# Altium PCB clock_pcb.PcbDoc (part 1 of 2)
Units mm, origin at the board's own origin, x right, y up, seen from the top; angles counter-clockwise.
Board outline 163.83 x 193.04 mm, 2 copper layers (Top Layer, Bottom Layer); 227 components, 201 nets, 760 pads, 289 vias.
Unrouted connection lines stored in the file: 74.
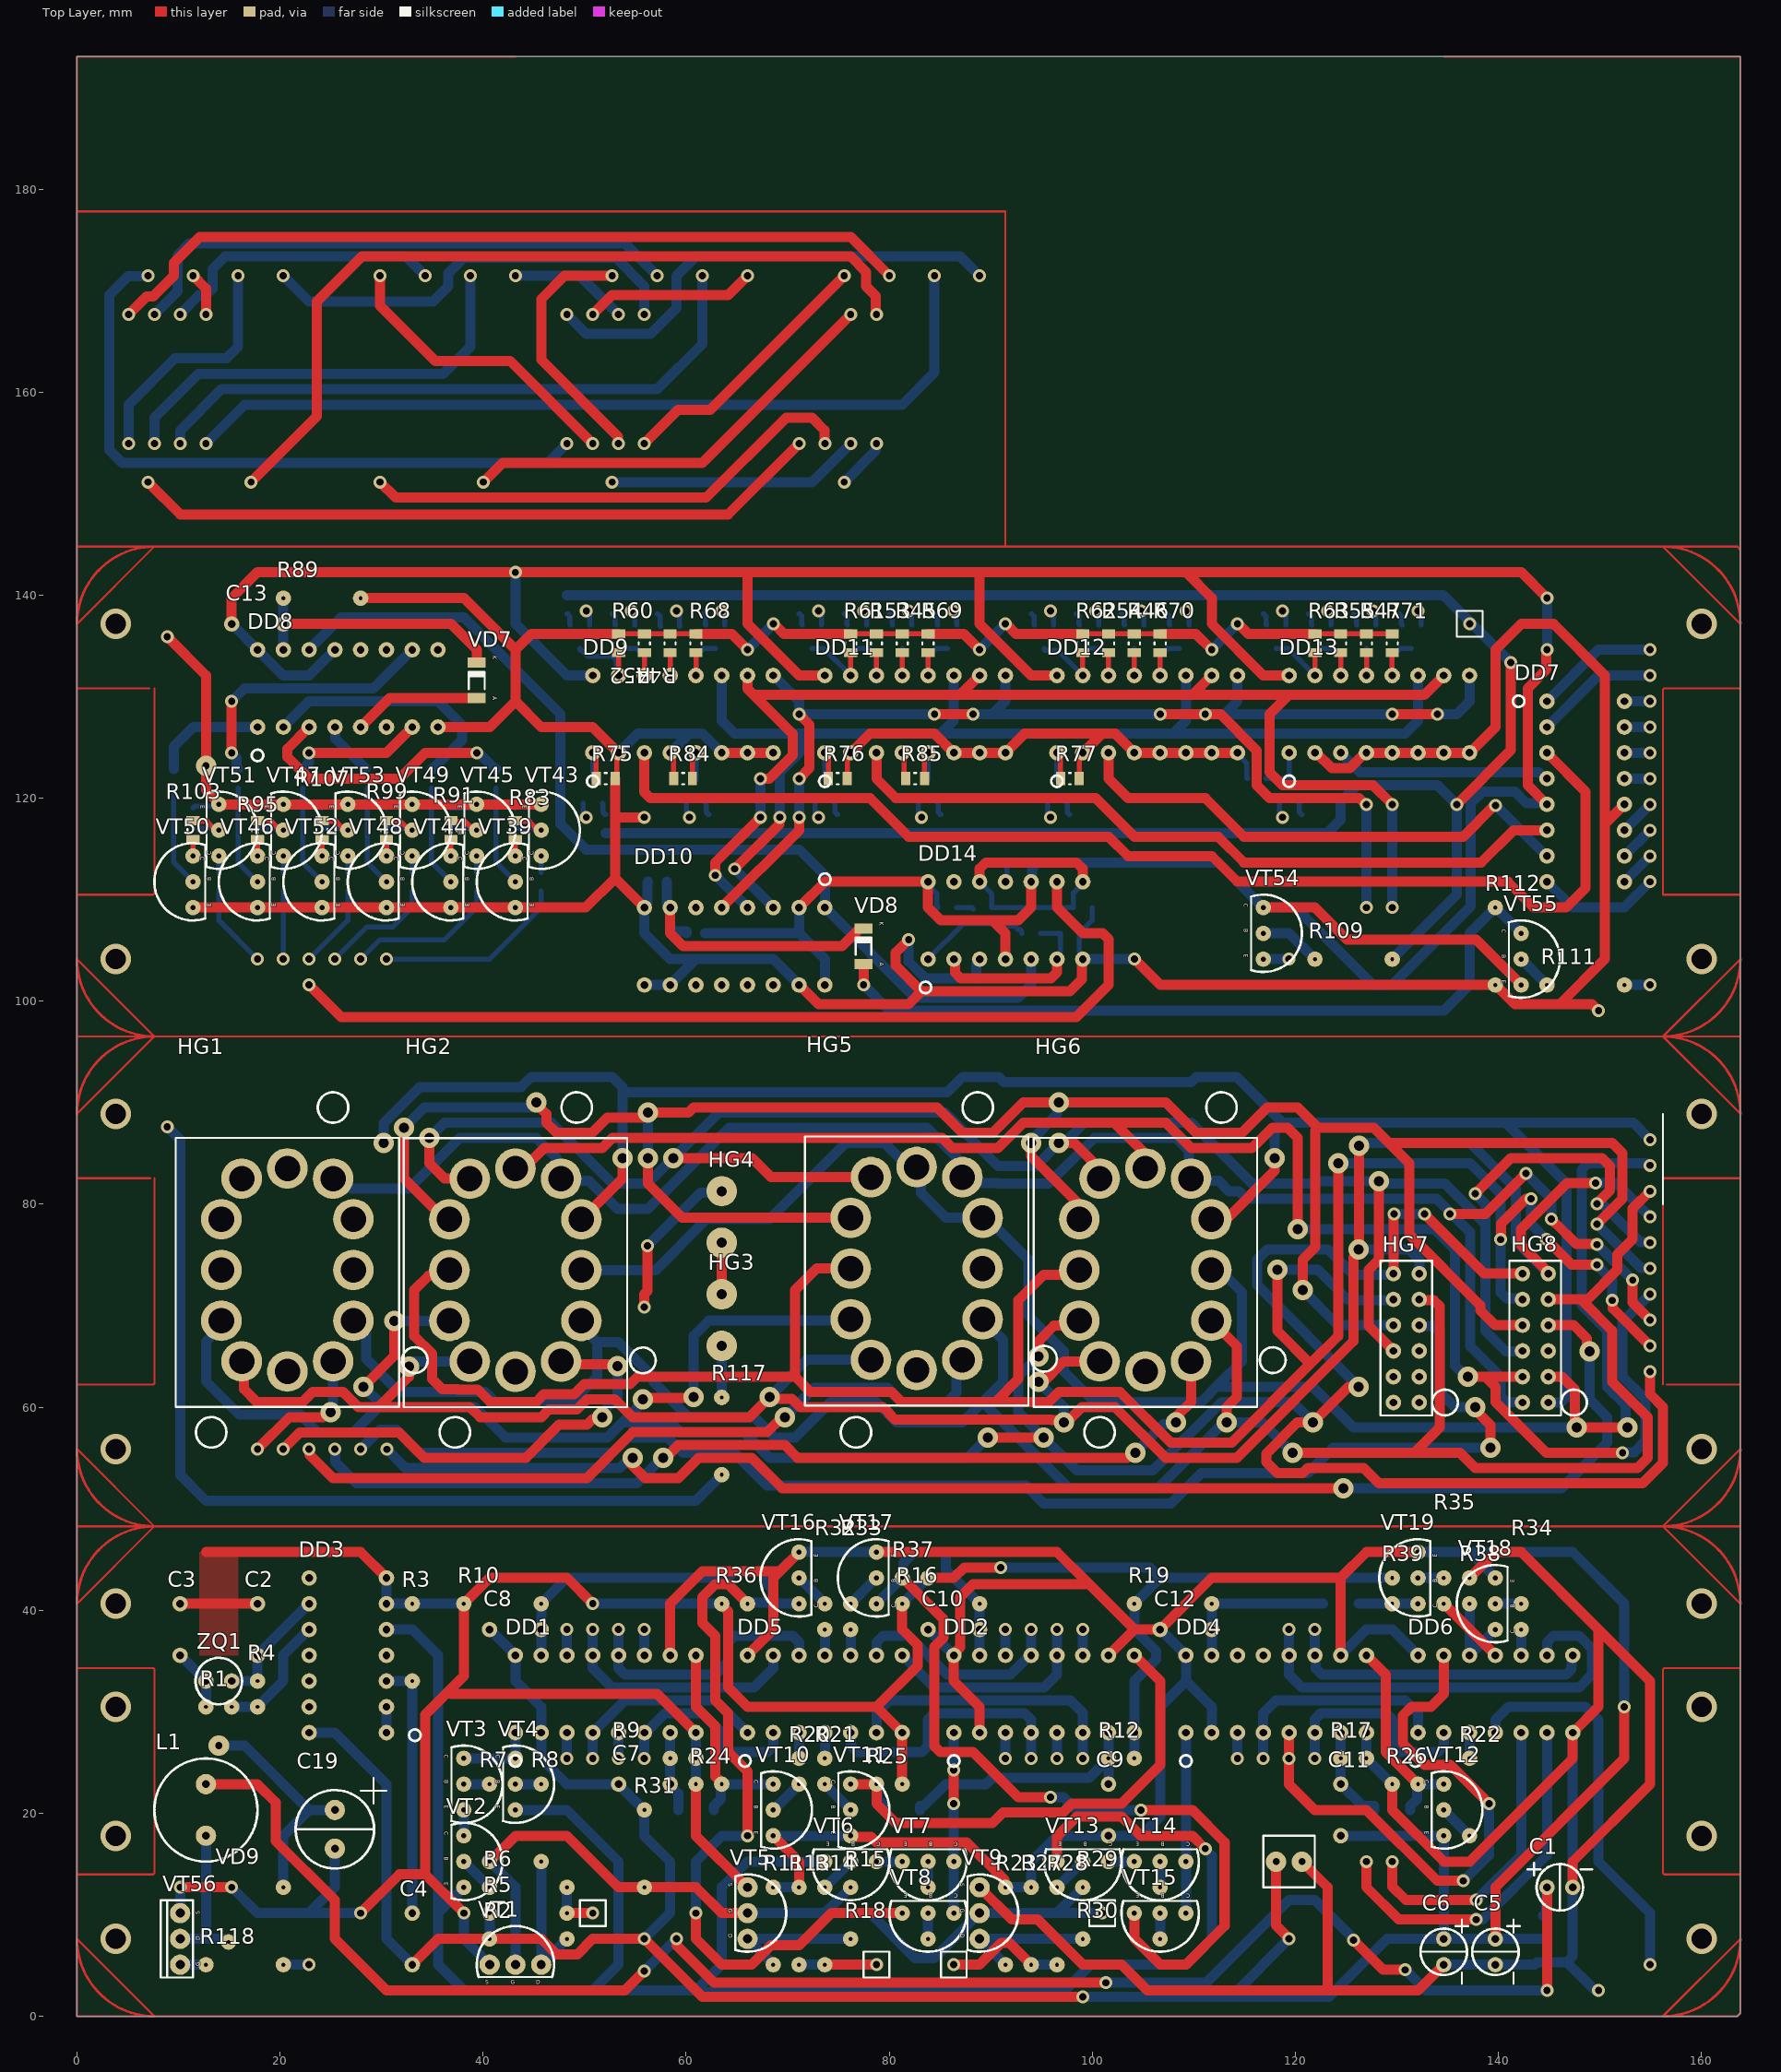
[diagram p0: Top Layer view]
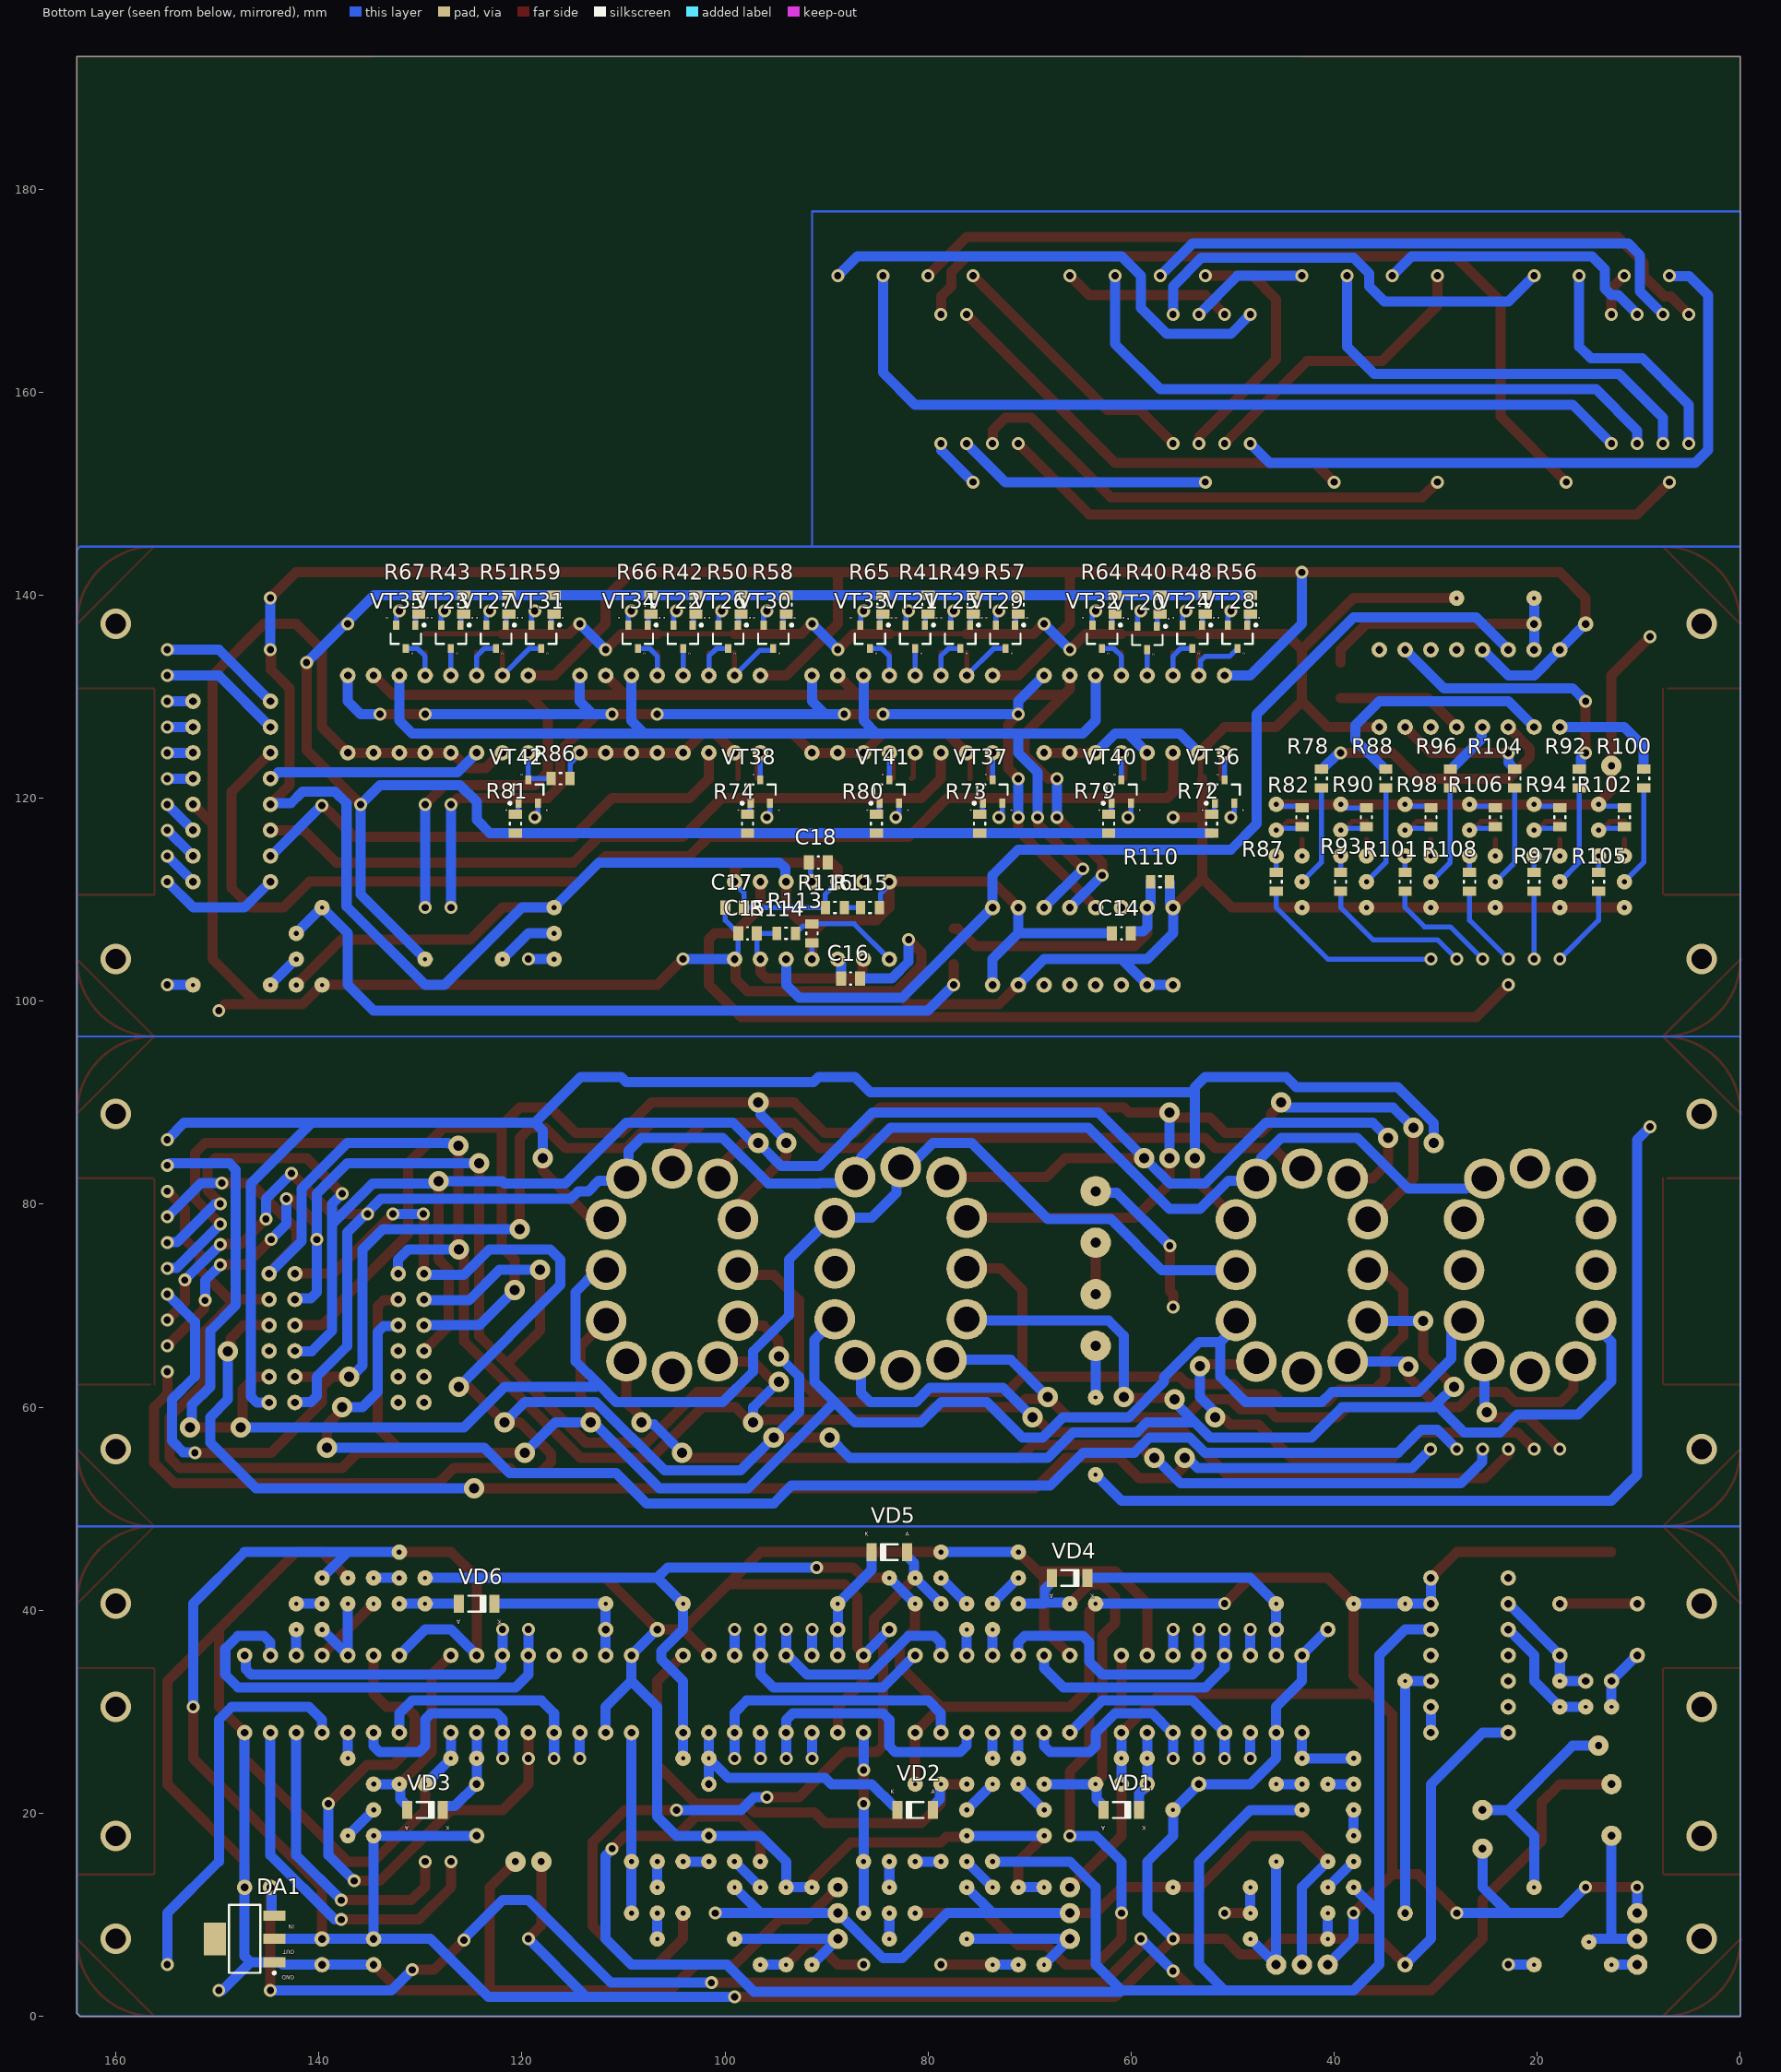
[diagram p1: Bottom Layer view, seen from below]
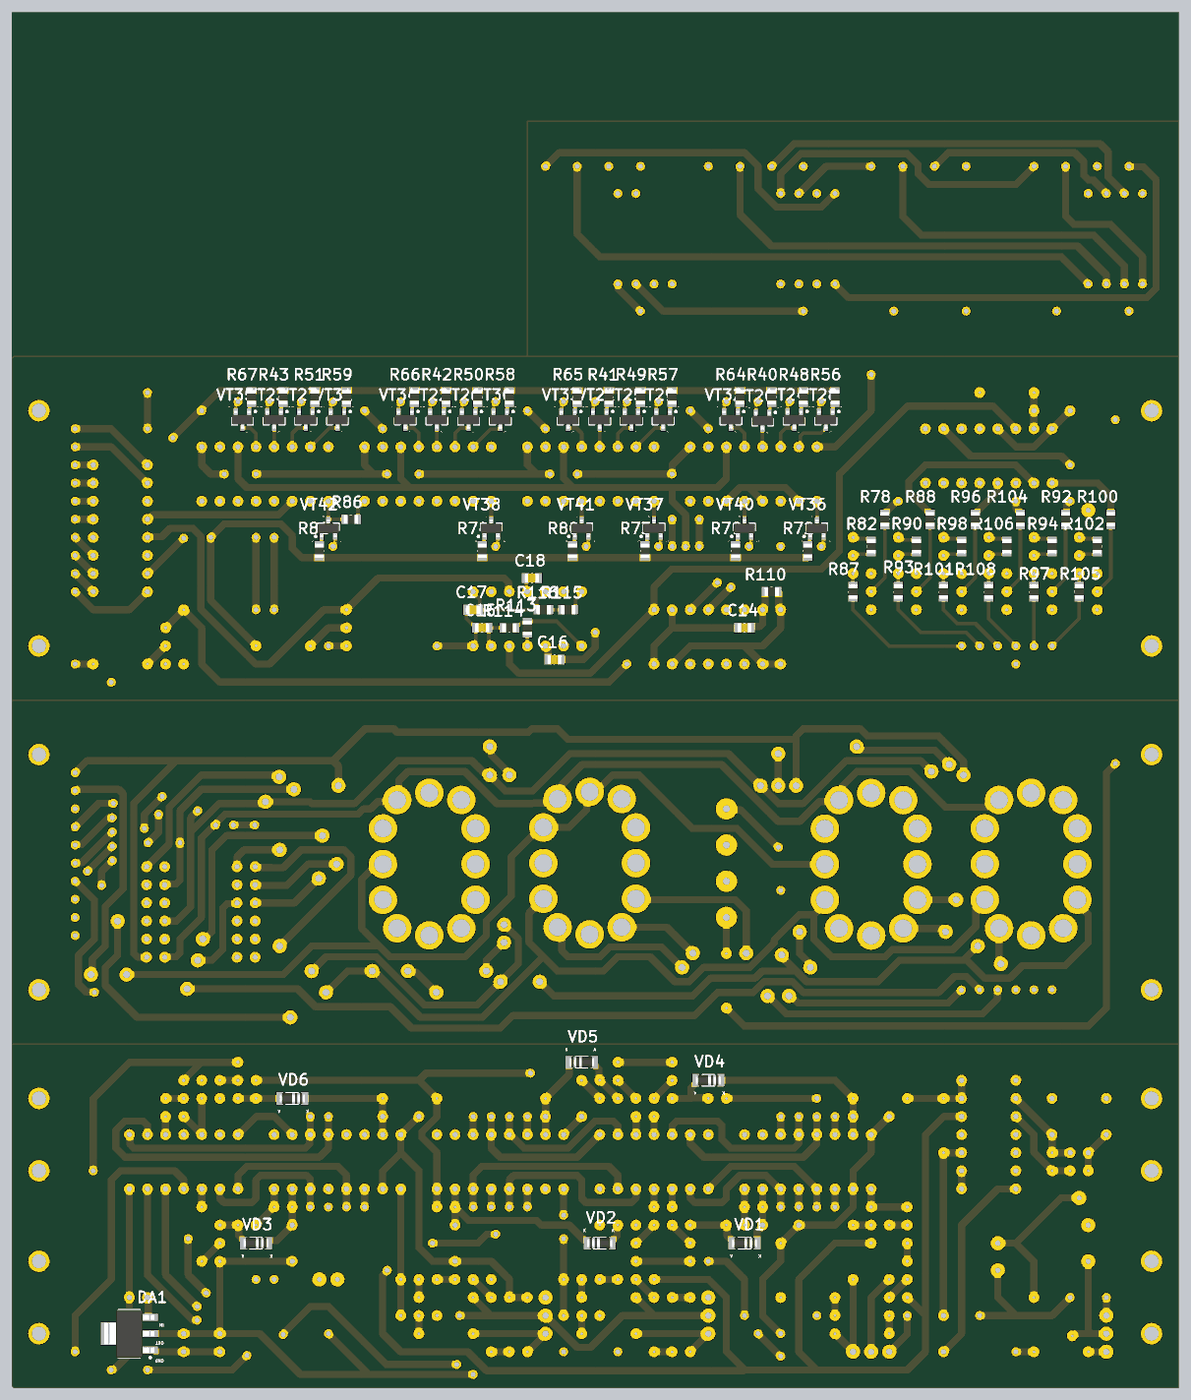
[diagram p3: 3D render of the assembled board from below, using the file's embedded part models]

## Layer stack, top to bottom
Top Solder: solder mask 0.0102, Solder Resist, Dk 3.5
Top Layer: signal copper 0.0356
Dielectric 1: dielectric 0.32, FR-4, Dk 4.8
Bottom Layer: signal copper 0.0356
Bottom Solder: solder mask 0.0102, Solder Resist, Dk 3.5

## Board outline
0,40.64 0,48.26 0,88.9 0,96.52 0,193.04 163.83,193.04 163.83,144.487 163.83,0.293 163.537,0 0,0

## Design rules (kind name [scope] priority, off if disabled: settings)
Clearance [All] p1: gap=0.254 ignorepadtopadclearanceinfootprint=FALSE except(0: Arc-Hole Track-Hole SMDPad-Hole THPad-Hole Via-Hole Fill-Hole Poly-Hole Region-Hole Text-Hole)
ComponentClearance [All] p1: gap=0 collisioncheckmode=3 verticalgap=0 showdistances=TRUE
PolygonConnect [All] p1: connectstyle=Direct reliefconductorwidth=0.254 reliefentries=4 polygonreliefangle="90 Angle" airgapwidth=0.254
RoutingVias [All] p1: holewidth=1 width=2 viastyle="Through Hole" minholewidth=0.5 minwidth=1 maxholewidth=1 maxwidth=2
SolderMaskExpansion [All] p1: expansion=0.102 istentingtop=FALSE
Width [All] p1: maxlimit=1.5 minlimit=0.2 preferedwidth=1 minimp=50.000000 maximp=50.000000 favimp=50.000000
29 further rules are at their usual default settings.

## Classes and differential pairs
component class clock_pow: C15 C16 C17 C18 C19 DD14 HG1 HG2 HG3 HG4 HG5 HG6 HG7 HG8 L1 R113 R114 R115 R116 R117 R118 VD9 VT56
component class clock_mux: C13 C14 DD7 DD8 DD9 DD10 DD11 DD12 DD13 R40 R41 R42 R43 R44 R45 R46 R47 R48 R49 R50 R51 R52 R53 R54 R55 R56 R57 R58 R59 R60 R61 R62 R63 R64 R65 R66 R67 R68 R69 R70 R71 R72 R73 R74 R75 R76 R77 R78 R79 R80 R81 R82 R83 R84 R85 R86 R87 R88 R89 R90 R91 R92 R93 R94 R95 R96 R97 R98 R99 R100 R101 R102 R103 R104 R105 R106 R107 R108 R109 R110 R111 R112 VD7 VD8 VT20 VT21 VT22 VT23 VT24 VT25 VT26 VT27 VT28 VT29 VT30 VT31 VT32 VT33 VT34 VT35 VT36 VT37 VT38 VT39 VT40 VT41 VT42 VT43 VT44 VT45 VT46 VT47 VT48 VT49 VT50 VT51 VT52 VT53 VT54 VT55
component class clock_core: C1 C2 C3 C4 C5 C6 C7 C8 C9 C10 C11 C12 DA1 DD1 DD2 DD3 DD4 DD5 DD6 R1 R2 R3 R4 R5 R6 R7 R8 R9 R10 R11 R12 R13 R14 R15 R16 R17 R18 R19 R20 R21 R22 R23 R24 R25 R26 R27 R28 R29 R30 R31 R32 R33 R34 R35 R36 R37 R38 R39 VD1 VD2 VD3 VD4 VD5 VD6 VT1 VT2 VT3 VT4 VT5 VT6 VT7 VT8 VT9 VT10 VT11 VT12 VT13 VT14 VT15 VT16 VT17 VT18 VT19 ZQ1

## Components (designator, comment, footprint, x,y, rotation, side; value= is the part's Value field where it differs from the comment)
C1 "C+" CAP_POL 144.78,12.7 r0 top value="10 u"
C2 "C" CAP_THT 17.78,35.56 r90 top value="56 p"
C3 "C" CAP_THT 10.16,40.64 r270 top value="10 p"
C4 "C" CAP_THT 33.02,10.16 r270 top value="100 n"
C5 "C+" CAP_POL 139.7,7.62 r270 top value="10 u"
C6 "C+" CAP_POL 134.62,7.62 r270 top value="10 u"
C7 "C" CAP_THT 58.42,22.86 r180 top value="100 n"
C8 "C" CAP_THT 45.72,38.1 r180 top value="100 n"
C9 "C" CAP_THT 101.6,22.86 r270 top value="100 n"
C10 "C" CAP_THT 88.9,38.1 r180 top value="100 n"
C11 "C" CAP_THT 124.46,22.86 r270 top value="100 n"
C12 "C" CAP_THT 111.76,38.1 r180 top value="100 n"
C13 "C" CAP_THT 20.32,137.16 r180 top value="100 n"
C14 "C" CAP_SMD 60.96,106.68 r0 bottom value="100 n"
C15 "C" CAP_SMD 97.79,106.68 r0 bottom value="100 n"
C16 "C" CAP_SMD 87.63,102.235 r0 bottom value="100 n"
C17 "C" CAP_SMD 99.06,109.22 r0 bottom value="10 n"
C18 "C" CAP_SMD 90.805,113.665 r0 bottom value="100 n"
C19 "C+" CAP_HIGH_VOLT 25.4,20.32 r270 top value="4.7 u"
DA1 "AMS1117_5V" SOT230 147.32,7.62 r0 bottom
DD1 "К561ИЕ10" DIP-16 43.18,27.94 r90 top
DD2 "К561ИЕ10" DIP-16 86.36,27.94 r90 top
DD3 "К176ИЕ5" DIP-14 30.48,27.94 r180 top
DD4 "К561ИЕ10" DIP-16 109.22,27.94 r90 top
DD5 "К561ЛА7" DIP-14 66.04,27.94 r90 top
DD6 "К561ЛА7" DIP-14 132.08,27.94 r90 top
DD7 "К155ИД1" DIP-16 144.78,129.54 r0 top
DD8 "К561ИЕ8" DIP-16 17.78,127 r90 top
DD9 "К561КП2" DIP-16 50.8,124.46 r90 top
DD10 "К561ИЕ10" DIP-16 73.66,109.22 r270 top
DD11 "К561КП2" DIP-16 73.66,124.46 r90 top
DD12 "К561КП2" DIP-16 96.52,124.46 r90 top
DD13 "К561КП2" DIP-16 119.38,124.46 r90 top
DD14 "NE556" DIP-14 83.82,104.14 r90 top
HG1 "ИН-12" IN-12 14.22,73.52 r0 top
HG2 "ИН-12" IN-12 36.68,73.5 r0 top
HG3 "ИНА_ТН_02" INA_TN_02 63.5,66.04 r90 top
HG4 "ИНА_ТН_02" INA_TN_02 63.5,76.2 r90 top
HG5 "ИН-12" IN-12 76.2,73.66 r0 top
HG6 "ИН-12" IN-12 98.72,73.52 r0 top
HG7 "ИН-17" IN-17 129.66,60.46 r0 top
HG8 "ИН-17" IN-17 142.36,60.46 r0 top
L1 "L" IND 12.7,22.86 r270 top value="220 u"
R1 "R" RES-DIP-V 12.7,30.48 r0 top value="520 k"
R2 "R" RES-DIP 48.26,7.62 r180 top value="1 M"
R3 "R" RES-DIP 33.02,40.64 r270 top value="100 k"
R4 "R" RES-DIP-V 17.78,30.48 r90 top value="10 M"
R5 "R" RES-DIP 48.26,10.16 r180 top value="100 k"
R6 "R" RES-DIP 48.26,12.7 r180 top value="1 M"
R7 "R" RES-DIP 40.64,15.24 r90 top value="1 M"
R8 "R" RES-DIP 45.72,22.86 r270 top value="1 M"
R9 "R" RES-DIP-V 60.96,25.4 r180 top value="10 k"
R10 "R" RES-DIP 38.1,40.64 r0 top value="10 k"
R11 "R" RES-DIP 68.58,5.08 r90 top value="1 M"
R12 "R" RES-DIP-V 104.14,25.4 r180 top value="10 k"
R13 "R" RES-DIP 71.12,5.08 r90 top value="100 k"
R14 "R" RES-DIP 73.66,5.08 r90 top value="1 M"
R15 "R" RES-DIP 76.2,12.7 r0 top value="1 M"
R16 "R" RES-DIP 81.28,40.64 r0 top value="10 k"
R17 "R" RES-DIP-V 127,25.4 r180 top value="10 k"
R18 "R" RES-DIP 83.82,7.62 r180 top value="1 M"
R19 "R" RES-DIP 104.14,40.64 r0 top value="10 k"
R20 "R" RES-DIP-V 71.12,25.4 r270 top value="1 k"
R21 "R" RES-DIP-V 73.66,25.4 r270 top value="1 k"
R22 "R" RES-DIP 137.16,25.4 r270 top value="1 k"
R23 "R" RES-DIP 91.44,5.08 r90 top value="1 M"
R24 "R" RES-DIP-V 60.96,22.86 r0 top value="100 k"
R25 "R" RES-DIP-V 81.28,22.86 r180 top value="100 k"
R26 "R" RES-DIP-V 129.54,22.86 r0 top value="100 k"
R27 "R" RES-DIP 93.98,5.08 r90 top value="100 k"
R28 "R" RES-DIP 96.52,5.08 r90 top value="1 M"
R29 "R" RES-DIP 99.06,12.7 r0 top value="1 M"
R30 "R" RES-DIP 106.68,7.62 r180 top value="1 M"
R31 "R" RES-DIP 55.88,20.32 r270 top value="10 k"
R32 "R" RES-DIP-V 73.66,38.1 r90 top value="1 k"
R33 "R" RES-DIP-V 76.2,38.1 r90 top value="1 k"
R34 "R" RES-DIP-V 142.24,38.1 r90 top value="1 k"
R35 "R" RES-DIP-V 134.62,40.64 r90 top value="1 k"
R36 "R" RES-DIP-V 63.5,40.64 r0 top value="100 k"
R37 "R" RES-DIP-V 83.82,43.18 r180 top value="100 k"
R38 "R" RES-DIP-V 137.16,43.18 r270 top value="100 k"
R39 "R" RES-DIP-V 129.54,43.18 r270 top value="100 k"
R40 "R" RES_SMD 57.15,139.065 r270 bottom value="5.1 k"
R41 "R" RES_SMD 80.01,139.065 r270 bottom value="5.1 k"
R42 "R" RES_SMD 102.87,139.065 r270 bottom value="5.1 k"
R43 "R" RES_SMD 125.73,139.065 r270 bottom value="5.1 k"
R44 "R" RES_SMD 58.42,135.255 r270 top value="100 k"
R45 "R" RES_SMD 81.28,135.255 r270 top value="100 k"
R46 "R" RES_SMD 104.14,135.255 r270 top value="100 k"
R47 "R" RES_SMD 127,135.255 r270 top value="100 k"
R48 "R" RES_SMD 52.705,139.065 r270 bottom value="5.1 k"
R49 "R" RES_SMD 75.565,139.065 r270 bottom value="5.1 k"
R50 "R" RES_SMD 98.425,139.065 r270 bottom value="5.1 k"
R51 "R" RES_SMD 121.285,139.065 r270 bottom value="5.1 k"
R52 "R" RES_SMD 55.88,135.255 r270 top value="100 k"
R53 "R" RES_SMD 78.74,135.255 r270 top value="100 k"
R54 "R" RES_SMD 101.6,135.255 r270 top value="100 k"
R55 "R" RES_SMD 124.46,135.255 r270 top value="100 k"
R56 "R" RES_SMD 48.26,139.065 r270 bottom value="5.1 k"
R57 "R" RES_SMD 71.12,139.065 r270 bottom value="5.1 k"
R58 "R" RES_SMD 93.98,139.065 r270 bottom value="5.1 k"
R59 "R" RES_SMD 116.84,139.065 r270 bottom value="5.1 k"
R60 "R" RES_SMD 53.34,135.255 r270 top value="100 k"
R61 "R" RES_SMD 76.2,135.255 r270 top value="100 k"
R62 "R" RES_SMD 99.06,135.255 r270 top value="100 k"
R63 "R" RES_SMD 121.92,135.255 r270 top value="100 k"
R64 "R" RES_SMD 61.595,139.065 r270 bottom value="5.1 k"
R65 "R" RES_SMD 84.455,139.065 r270 bottom value="5.1 k"
R66 "R" RES_SMD 107.315,139.065 r270 bottom value="5.1 k"
R67 "R" RES_SMD 130.175,139.065 r270 bottom value="5.1 k"
R68 "R" RES_SMD 60.96,135.255 r270 top value="100 k"
R69 "R" RES_SMD 83.82,135.255 r270 top value="100 k"
R70 "R" RES_SMD 106.68,135.255 r270 top value="100 k"
R71 "R" RES_SMD 129.54,135.255 r270 top value="100 k"
R72 "R" RES_SMD 52.07,117.475 r90 bottom value="5.1 k"
R73 "R" RES_SMD 74.93,117.475 r90 bottom value="5.1 k"
R74 "R" RES_SMD 97.79,117.475 r90 bottom value="5.1 k"
R75 "R" RES_SMD 52.07,121.92 r180 top value="100 k"
R76 "R" RES_SMD 74.93,121.92 r180 top value="100 k"
R77 "R" RES_SMD 97.79,121.92 r180 top value="100 k"
R78 "R" RES_SMD 41.275,121.92 r270 bottom value="10 k"
R79 "R" RES_SMD 62.23,117.475 r90 bottom value="5.1 k"
R80 "R" RES_SMD 85.09,117.475 r90 bottom value="5.1 k"
R81 "R" RES_SMD 120.65,117.475 r90 bottom value="5.1 k"
R82 "R" RES_SMD 43.18,118.11 r90 bottom value="10 k"
R83 "R" RES_SMD 43.18,116.84 r90 top value="1 M"
R84 "R" RES_SMD 59.69,121.92 r0 top value="100 k"
R85 "R" RES_SMD 82.55,121.92 r0 top value="100 k"
R86 "R" RES_SMD 116.205,121.92 r0 bottom value="100 k"
R87 "R" RES_SMD 45.72,111.76 r90 bottom value="20 k"
R88 "R" RES_SMD 34.925,121.92 r270 bottom value="10 k"
R89 "R" RES-DIP 27.94,139.7 r180 top value="10 k"
R90 "R" RES_SMD 36.83,118.11 r90 bottom value="10 k"
R91 "R" RES_SMD 36.83,116.84 r90 top value="1 M"
R92 "R" RES_SMD 15.875,121.92 r270 bottom value="10 k"
R93 "R" RES_SMD 39.37,111.76 r90 bottom value="20 k"
R94 "R" RES_SMD 17.78,118.11 r90 bottom value="10 k"
R95 "R" RES_SMD 17.78,116.84 r90 top value="1 M"
R96 "R" RES_SMD 28.575,121.92 r270 bottom value="10 k"
R97 "R" RES_SMD 20.32,111.76 r90 bottom value="20 k"
R98 "R" RES_SMD 30.48,118.11 r90 bottom value="10 k"
R99 "R" RES_SMD 30.48,116.84 r90 top value="1 M"
R100 "R" RES_SMD 9.525,121.92 r270 bottom value="10 k"
R101 "R" RES_SMD 33.02,111.76 r90 bottom value="20 k"
R102 "R" RES_SMD 11.43,118.11 r90 bottom value="10 k"
R103 "R" RES_SMD 11.43,116.84 r90 top value="1 M"
R104 "R" RES_SMD 22.225,121.92 r270 bottom value="10 k"
R105 "R" RES_SMD 13.97,111.76 r90 bottom value="20 k"
R106 "R" RES_SMD 24.13,118.11 r90 bottom value="10 k"
R107 "R" RES_SMD 24.13,116.84 r90 top value="1 M"
R108 "R" RES_SMD 26.67,111.76 r90 bottom value="20 k"
R109 "R" RES-DIP 129.54,104.14 r180 top value="10 k"
R110 "R" RES_SMD 57.15,111.76 r0 bottom value="10 k"
R111 "R" RES-DIP 152.4,101.6 r180 top value="1 k"
R112 "R" RES-DIP 139.7,101.6 r90 top value="100 k"
R113 "R" RES_SMD 91.44,106.68 r270 bottom value="20 k"
R114 "R" RES_SMD 93.98,106.68 r180 bottom value="10 k"
R115 "R" RES_SMD 85.725,109.22 r180 bottom value="2.2 k"
R116 "R" RES_SMD 89.19,109.22 r180 bottom value="1.2 k"
R117 "R" RES-DIP 63.5,53.34 r90 top value="100 k"
R118 "R" RES-DIP 20.32,5.08 r180 top value="10 k"
VD1 "1N4148" DIOD 60.96,20.32 r0 bottom
VD2 "1N4148" DIOD 81.28,20.32 r180 bottom
VD3 "1N4148" DIOD 129.54,20.32 r0 bottom
VD4 "1N4148" DIOD 66.04,43.18 r0 bottom
VD5 "1N4148" DIOD 83.82,45.72 r180 bottom
VD6 "1N4148" DIOD 124.46,40.64 r0 bottom
VD7 "1N4148" DIOD 39.37,131.6 r270 top
VD8 "1N4148" DIOD 77.47,105.41 r270 top
VD9 "1N4007" RES-DIP 20.32,12.7 r225 top
VT1 "2N7000" 2N7000 40.64,5.08 r0 top
VT2 "BC327" BC327 38.1,17.78 r270 top
VT3 "BC327" BC327 38.1,25.4 r270 top
VT4 "BC327" BC327 43.18,25.4 r270 top
VT5 "2N7000" 2N7000 66.04,12.7 r270 top
VT6 "BC327" BC327 78.74,15.24 r180 top
VT7 "BC327" BC327 86.36,15.24 r180 top
VT8 "BC327" BC327 86.36,10.16 r180 top
VT9 "2N7000" 2N7000 88.9,12.7 r270 top
VT10 "BC327" BC327 68.58,22.86 r270 top
VT11 "BC327" BC327 76.2,22.86 r270 top
VT12 "BC327" BC327 134.62,22.86 r270 top
VT13 "BC327" BC327 101.6,15.24 r180 top
VT14 "BC327" BC327 109.22,15.24 r180 top
VT15 "BC327" BC327 109.22,10.16 r180 top
VT16 "BC327" BC327 71.12,40.64 r90 top
VT17 "BC327" BC327 78.74,40.64 r90 top
VT18 "BC327" BC327 139.7,38.1 r90 top
VT19 "BC327" BC327 132.08,40.64 r90 top
VT20 "BC807" SOT95 58.42,135.77 r270 bottom
VT21 "BC807" SOT95 81.28,135.89 r270 bottom
VT22 "BC807" SOT95 104.14,135.89 r270 bottom
VT23 "BC807" SOT95 127,135.89 r270 bottom
VT24 "BC807" SOT95 53.975,135.89 r270 bottom
VT25 "BC807" SOT95 76.835,135.89 r270 bottom
VT26 "BC807" SOT95 99.695,135.89 r270 bottom
VT27 "BC807" SOT95 122.555,135.89 r270 bottom
VT28 "BC807" SOT95 49.53,135.89 r270 bottom
VT29 "BC807" SOT95 72.39,135.89 r270 bottom
VT30 "BC807" SOT95 95.25,135.89 r270 bottom
VT31 "BC807" SOT95 118.11,135.89 r270 bottom
VT32 "BC807" SOT95 62.865,135.89 r270 bottom
VT33 "BC807" SOT95 85.725,135.89 r270 bottom
VT34 "BC807" SOT95 108.585,135.89 r270 bottom
VT35 "BC807" SOT95 131.445,135.89 r270 bottom
VT36 "BC807" SOT95 50.8,120.65 r90 bottom
VT37 "BC807" SOT95 73.66,120.65 r90 bottom
VT38 "BC807" SOT95 96.52,120.65 r90 bottom
VT39 "2N5551" 2N5551 43.18,109.22 r90 top
VT40 "BC807" SOT95 60.96,120.65 r90 bottom
VT41 "BC807" SOT95 83.82,120.65 r90 bottom
VT42 "BC807" SOT95 119.38,120.65 r90 bottom
VT43 "2N5401" 2N5401 45.72,119.38 r270 top
VT44 "2N5551" 2N5551 36.83,109.22 r90 top
VT45 "2N5401" 2N5401 39.37,119.38 r270 top
VT46 "2N5551" 2N5551 17.78,109.22 r90 top
VT47 "2N5401" 2N5401 20.32,119.38 r270 top
VT48 "2N5551" 2N5551 30.48,109.22 r90 top
VT49 "2N5401" 2N5401 33.02,119.38 r270 top
VT50 "2N5551" 2N5551 11.43,109.22 r90 top
VT51 "2N5401" 2N5401 13.97,119.38 r270 top
VT52 "2N5551" 2N5551 24.13,109.22 r90 top
VT53 "2N5401" 2N5401 26.67,119.38 r270 top
VT54 "BC327" BC327 116.84,109.22 r270 top
VT55 "BC327" BC327 142.24,106.68 r270 top
VT56 "IRF840" IRF840 10.16,5.08 r90 top
ZQ1 "HZ" HZ 12.7,33.02 r0 top

## Footprints (in the part's own frame and the unit in brackets; to place one, negate y for a bottom-side part, rotate by r counter-clockwise, add the part's x,y. Pads: shape width x height; smd on the part's side, far side on the other; paste and mask are expansions set on the pad)
2N5401 [mil]
  round 60 hole 19.68: 1(0,0) 2(100,0) 3(200,0)
  silkscreen extent -50,-47 250,150, body extent 25,-75 175,75, height 400
2N5551 [mil]
  round 60 hole 19.68: 1(0,0) 2(100,0) 3(200,0)
  silkscreen extent -50,-47 250,150, body extent 25,-75 175,75, height 400
2N7000 [mm]
  round 2 hole 0.9: 1(0,0) 2(2.54,0) 3(5.08,0)
  silkscreen extent -1.27,-1.2 6.35,3.81, body extent 0.64,-1.91 4.44,1.91, height 10.16
BC327 [mil]
  round 60 hole 19.68: 1(0,0) 2(100,0) 3(200,0)
  silkscreen extent -50,-47 250,150, body extent 25,-75 175,75, height 400
CAP_HIGH_VOLT [mm]
  round 2 hole 0.762: 1(0,0) 2(3.81,0)
  silkscreen extent -3.18,-3.86 5.77,5.08
CAP_POL [mil]
  round 60 hole 30: 1(0,0) 2(100,0)
  silkscreen extent -75,-90 175,95
CAP_SMD [mm] "Chip Capacitor, 2-Leads, Body 2,00x1,25mm, IPC Medium Density"
  rect 1x1.4 smd: 1(-0.925,0) 2(0.925,0)
  silkscreen extent -0.05,-0.6 0.05,0.6, body extent -1,-0.63 1,0.62, height 0.7
CAP_THT [mil]
  round 60 hole 30: 1(0,0) 2(200,0)
  body extent 25,-59 175,59, height 197
DIOD [mm] "MELF Diode, 2-Leads, Body 3,50x1,53mm, IPC Medium Density"
  rect 1x1.75 smd: 1(-1.75,0) 2(1.75,0)
  silkscreen extent -0.85,-0.77 0.85,0.77, body extent -1.75,-0.76 1.75,0.76, height 1.53
DIP-14 [mil]
  round 60 hole 30: 1(0,0) 2(0,-100) 3(0,-200) 4(0,-300) 5(0,-400) 6(0,-500) 7(0,-600) 8(300,-600) 9(300,-500) 10(300,-400) 11(300,-300) 12(300,-200) 13(300,-100) 14(300,0)
  silkscreen extent -132,-12 -88,32, body extent -50,-650 350,50, height 315
DIP-16 [mil]
  round 60 hole 30: 1(0,0) 2(0,-100) 3(0,-200) 4(0,-300) 5(0,-400) 6(0,-500) 7(0,-600) 8(0,-700) 9(300,-700) 10(300,-600) 11(300,-500) 12(300,-400) 13(300,-300) 14(300,-200) 15(300,-100) 16(300,0)
  silkscreen extent -132,-22 -88,22, body extent -50,-750 350,50, height 315
HZ [mil]
  round 60 hole 30: 1(0,0) 2(100,0)
  silkscreen extent -40,-90 140,90
IN-12 [mm]
  round 4 hole 2.5: 1(11,-9) 2(13,-5) 3(13,0) 4(13,5) 5(11,9) 6(6.5,10) 7(2,9) 8(0,5) 9(0,0) 10(0,-5) 11(2,-9) 12(6.5,-10)
  silkscreen extent -4.5,-13.5 20.32,13, body extent -4.5,-21.5 17.5,20.5, height 11
IN-17 [mil]
  round 60 hole 30: 1(100,300) 2(100,400) 3(100,500) 4(0,500) 5(0,400) 6(0,300) 7(0,200) 8(0,100) 9(0,0) 10(100,0) 11(100,100) 12(100,200)
  silkscreen extent -50,-50 250,550
INA_TN_02 [mm]
  round 3 hole 1: 1(0,0) 2(5.08,0)
IND [mm]
  round 2 hole 0.762: 1(0,0) 2(5.08,0)
  silkscreen extent -2.54,-5.08 7.62,5.08
IRF840 [mm]
  round 2 hole 0.9: 1(0,0) 2(2.54,0) 3(5.08,0)
  silkscreen extent -1.27,-1.27 6.35,1.91, body extent 0.63,-1.91 4.44,1.91, height 10.16
RES-DIP [mil]
  round 60 hole 15.75: 1(0,0) 2(300,0)
  body extent 50,-50 250,50, height 100
RES-DIP-V [mil]
  round 60 hole 15.75: 1(0,0) 2(100,0)
  body extent 50,-50 150,50, height 200
RES_SMD [mm] "Chip Resistor, 2-Leads, Body 2,00x1,25mm, IPC Medium Density"
  rect 0.9x1.3 smd: 1(-0.925,0) 2(0.925,0)
  silkscreen extent -0.1,-0.55 0.1,0.55, body extent -1,-0.63 1,0.62, height 0.7
SOT95 [mm] "SOT23, 3-Leads, Body 2,90x2,30mm, Pitch 0,95mm, IPC Medium Density"
  rect 0.9x0.6 smd: 1(-1.15,0.95) 2(-1.15,-0.95) 3(1.15,0)
  silkscreen extent -1.27,-1.5 0.7,1.92, body extent -1.25,-1.5 1.25,1.5, height 1.1
SOT230 [mm] "SOT223, 4-Leads, Body 6,50x7,00mm (avg), Pitch 2,30mm, IPC Medium Density"
  rect 2.15x1 smd: 1(-2.925,2.3) 2(-2.925,0) 3(-2.925,-2.3)
  rect 2.15x3.2 smd: 4(2.925,0)
  silkscreen extent -3.05,-3.35 1.55,3.47, body extent -3.5,-3.35 3.5,3.35, height 1.8

## Via types
v1: diameter 1.27, hole 0.711, Top Layer to Bottom Layer, 220 vias
v2: diameter 2, hole 1, Top Layer to Bottom Layer, 49 vias
v3: diameter 3, hole 2, Top Layer to Bottom Layer, 16 vias
v4: diameter 2, hole 0.7, Top Layer to Bottom Layer, 2 vias
v5: diameter 2, hole 0.711, Top Layer to Bottom Layer, 2 vias

## Nets (pads, with @x,y where several pads share a name; then routed paths per layer and width w, separated by ;. In a path a pad name is that pad's centre, name@x,y a point inside that pad or via, vN(x,y) a via of type N, cw(c..) or ccw(c..) an arc to the next point about the centre after c; other vN are vias at no path point)
5V: C4.2 C5.1 C6.1 C7.2 C8.2 C9.2 C10.2 C11.2 C12.2 DA1.2 DD1.2 DD1.10 DD1.16 DD2.2 DD2.10 DD2.16 DD3.14 DD4.2 DD4.10 DD4.16 DD5.14 DD6.14 R2.2 R5.2 R11.2 R13.2 R23.2 R27.2 R31.1 VT10.3 VT11.3 VT12.3 VT16.3 VT17.3 VT18.3 VT19.3 VT54.3 | length 524
  Top Layer w1: C4.2@33.02,5.08 35.56,7.62 R2.2@40.64,7.62 45.72,7.62 47.236,6.104 49.284,6.104 50.8,7.62 v1(55.88,7.62) 61.595,1.905 89.408,1.905 v1(99.06,1.905) ; DD1.10@58.42,35.56 58.42,40.64 61.595,43.815 69.215,43.815 ; DD5.14@66.04,35.56 68.58,38.1 68.58,43.18 69.215,43.815 ; VT10.3@68.58,17.78 71.12,15.24 R13.2@71.12,12.7 ; VT16.3@71.12,45.72 69.215,43.815 ; VT11.3@76.2,17.78 76.3,17.68 78.205,17.68 78.74,17.145 87.63,17.145 91.34,13.435 91.34,12.8 R23.2@91.44,12.7 ; VT17.3@78.74,45.72 96.52,45.72 99.695,42.545 ; DD2.2@88.9,27.94 88.9,30.48 86.36,33.02 DD2.16@86.36,35.56 86.36,35.702 86.995,36.337 86.995,41.275 88.265,42.545 99.695,42.545 ; DD2.10@101.6,35.56 104.14,38.1 ; v4(118.11,15.24) 118.11,8.963 119.38,7.693 v1(119.38,7.62) ; DD4.10@124.46,35.56 124.46,43.18 ; VT19.3@132.08,45.72 127,45.72 124.46,43.18 ; C5.1@139.7,7.62 139.7,12.7 152.4,25.4 v1(152.4,30.48) ; 99.695,42.545 104.14,38.1 ; 104.14,38.1 C12.2@106.68,38.1 111.76,43.18 124.46,43.18
  Bottom Layer w1: DD3.14@22.86,27.94 25.4,27.94 30.48,22.86 30.48,7.62 C4.2@33.02,5.08 ; R2.2@40.64,7.62 R5.2@40.64,10.16 ; C8.2@40.64,38.1 DD1.16@43.18,35.56 43.18,33.02 45.72,30.48 45.72,25.4 48.26,22.86 C7.2@53.34,22.86 R31.1@55.88,20.32 55.88,17.78 58.42,15.24 58.42,10.16 v1(55.88,7.62) ; R11.2@68.58,12.7 R13.2@71.12,12.7 ; VT10.3@68.58,17.78 VT11.3@76.2,17.78 ; VT16.3@71.12,45.72 VT17.3@78.74,45.72 ; C10.2@83.82,38.1 DD2.16@86.36,35.56 ; R23.2@91.44,12.7 R27.2@93.98,12.7 93.98,15.24 96.52,17.78 C9.2@101.6,17.78 104.775,17.78 106.68,19.685 106.68,30.48 109.22,33.02 ; v1(99.06,1.905) 123.317,1.905 129.032,7.62 C6.1@134.62,7.62 ; C12.2@106.68,38.1 DD4.16@109.22,35.56 109.22,33.02 ; DD4.2@111.76,27.94 111.76,30.48 109.22,33.02 ; 113.824,2.064 v1(119.38,7.62) ; VT54.3@116.84,104.14 v1(119.38,104.14) ; C11.2@124.46,17.78 VT12.3@134.62,17.78 C6.1@134.62,7.62 ; DD4.10@124.46,35.56 127,38.1 129.54,38.1 DD6.14@132.08,35.56 ; VT19.3@132.08,45.72 137.16,45.72 ; VT18.3@139.7,43.18 137.16,45.72 ; DA1.2@144.395,7.62 C5.1@139.7,7.62 C6.1@134.62,7.62 ; v1(152.4,30.48) 152.4,40.64 147.32,45.72 137.16,45.72
5V_C: C13.2 C14.2 DD7.5 DD8.13 DD8.16 DD9.16 DD10.2 DD10.16 DD11.16 DD12.16 DD13.16 DD14.4 DD14.10 DD14.14 R113.2 R115.2 VT54.1 VT55.3 | length 386.7
  Top Layer w1: C13.2@15.24,137.16 15.24,139.7 17.78,142.24 v1(43.18,142.24) 66.04,142.24 ; DD10.2@71.12,109.22 73.66,111.76 DD14.14@83.82,111.76 83.82,109.22 85.09,107.95 90.17,107.95 ; DD11.16@73.66,132.08 71.12,132.08 66.04,137.16 66.04,142.24 ; DD14.4@91.44,104.14 91.44,106.68 90.17,107.95 ; DD14.10@93.98,111.76 93.98,109.22 92.71,107.95 90.17,107.95 ; DD12.16@96.52,132.08 93.98,132.08 88.9,137.16 88.9,142.24 ; VT54.1@116.84,109.22 121.92,109.22 125.095,106.045 137.795,106.045 VT55.3@142.24,101.6 ; DD13.16@119.38,132.08 116.84,132.08 111.76,137.16 111.76,139.7 109.22,142.24 ; DD7.5@144.78,119.38 142.875,121.285 142.875,130.81 144.728,132.663 144.728,134.568 v1(144.78,134.62) ; v1(144.78,139.7) 142.24,142.24 109.22,142.24 ; 66.04,142.24 88.9,142.24 ; 88.9,142.24 109.22,142.24
  Bottom Layer w0.5: DD14.14@83.82,111.76 83.82,111.483 84.683,110.62 84.683,109.337 R115.2@84.8,109.22 ; DD14.4@91.44,104.14 R113.2@91.44,105.755
  Bottom Layer w1: C13.2@15.24,137.16 DD8.16@17.78,134.62 20.32,132.08 22.86,132.08 DD8.13@25.4,134.62 ; v1(43.18,142.24) 43.18,137.16 48.26,132.08 DD9.16@50.8,132.08 ; C14.2@61.885,106.68 71.12,106.68 ; DD10.2@71.12,109.22 71.12,106.68 ; DD10.16@73.66,101.6 73.66,104.14 71.12,106.68 ; DD14.10@93.98,111.76 94.08,111.86 94.08,113.079 94.666,113.665 112.395,113.665 VT54.1@116.84,109.22 120.015,109.22 127.635,101.6 129.54,101.6 137.279,109.339 137.279,119.499 138.43,120.65 141.605,120.65 142.775,119.48 144.68,119.48 DD7.5@144.78,119.38 ; v1(144.78,134.62) v1(144.78,139.7)
9V: C1.1 DA1.3 L1.1 | length 169.7
  Top Layer w1: L1.1@12.7,22.86 17.78,22.86 19.558,21.082 19.558,17.272 25.4,11.43 25.4,7.62 30.48,2.54 53.975,2.54 v1(55.88,4.445) ; v1(59.055,7.62) 59.055,6.985 62.738,3.302 v1(101.346,3.302) ; v1(125.73,7.493) 128.651,4.572 v1(130.81,4.572) ; v1(144.78,2.54) C1.1@144.78,12.7
  Bottom Layer w1: v1(55.88,4.445) v1(59.055,7.62) ; v1(101.346,3.302) 111.252,3.302 119.38,11.43 121.92,11.43 125.73,7.62 v1(125.73,7.493) v1@125.73,7.366 ; v1(130.81,4.572) 132.842,2.54 v1(144.78,2.54) ; DA1.3@144.395,9.92 144.68,9.92 144.68,12.6 C1.1@144.78,12.7
180V: C19.1 R82.2 R90.2 R94.2 R98.2 R102.2 R106.2 R117.1 VD9.1 VT43.1 VT45.1 VT47.1 VT49.1 VT51.1 VT53.1 | length 179.5
  Top Layer w1: v1(8.89,135.89) 12.7,132.08 v5(12.7,123.19) 12.7,120.792 13.97,119.522 VT51.1@13.97,119.38 VT47.1@20.32,119.38 VT53.1@26.67,119.38 VT49.1@33.02,119.38 VT45.1@39.37,119.38 VT43.1@45.72,119.38
  Bottom Layer w0.5: R102.2@11.43,119.035 11.602,119.207 13.797,119.207 VT51.1@13.97,119.38 ; R94.2@17.78,119.035 17.952,119.207 20.147,119.207 VT47.1@20.32,119.38 ; R106.2@24.13,119.035 24.302,119.207 26.497,119.207 VT53.1@26.67,119.38 ; R98.2@30.48,119.035 30.652,119.207 32.847,119.207 VT49.1@33.02,119.38 ; R90.2@36.83,119.035 38.748,119.035 39.093,119.38 VT45.1@39.37,119.38 ; R82.2@43.18,119.035 43.352,119.207 45.547,119.207 VT43.1@45.72,119.38
  Bottom Layer w1: v1(8.89,87.63) 10.16,86.36 10.16,53.34 12.7,50.8 60.96,50.8 R117.1@63.5,53.34 ; v5(13.97,26.67) 16.51,26.67 22.86,20.32 ; VD9.1@20.32,12.7 20.32,17.78 22.86,20.32 ; C19.1@25.4,20.32 22.86,20.32
A0: HG8.1 R87.1 | length 160.6
  Top Layer w1: v2@54.47,54.52 55.97,53.02 59.22,53.02 61.22,55.02 66.47,55.02 69.47,52.02 v2(124.72,52.02) ; HG8.1@144.9,68.08 147.41,68.08 148.72,66.77 148.72,65.766 v2(148.966,65.52)
  Bottom Layer w0.5: v1(30.48,104.14) 40.64,104.14 45.72,109.22 R87.1@45.72,110.835
  Bottom Layer w1: v1(30.512,55.848) 32.34,54.02 53.47,54.02 54.47,55.02 v2(54.72,55.02) ; v2(124.72,52.02) 146.22,52.02 150.72,56.52 150.72,59.02 148.97,60.77 148.97,65.516 v2(148.966,65.52)
A0_B: DD8.3 R78.1 | length 27
  Top Layer w1: DD8.3@22.86,127 20.734,124.874 20.734,124.046 22.86,121.92 31.75,121.92 34.29,124.46 v1(39.37,124.46)
  Bottom Layer w1: v1(39.37,124.46) 39.56,124.46 41.175,122.845 R78.1@41.275,122.845
A1: HG7.1 R93.1 | length 149.7
  Top Layer w1: v2(137.72,60.02) 137.72,59.749 139.22,58.249 v2@139.22,57.02
  Bottom Layer w0.5: v1(27.94,104.14) 29.845,106.045 36.195,106.045 39.37,109.22 R93.1@39.37,110.835
  Bottom Layer w1: v1(27.94,55.88) 29.83,57.77 31.47,57.77 33.72,55.52 52.72,55.52 54.22,57.02 58.201,57.02 59.701,55.52 64.72,55.52 67.97,52.27 93.47,52.27 95.22,50.52 107.72,50.52 110.722,53.522 121.222,53.522 123.72,56.02 v2(139.22,56.02) ; HG7.1@132.2,68.08 132.3,67.98 133.634,67.98 134.22,67.394 134.22,61.52 135.72,60.02 v2(137.72,60.02)
A1_B: DD8.2 R88.1 | length 25.3
  Bottom Layer w1: DD8.2@20.32,127 22.86,129.54 35.56,129.54 37.91,127.19 37.91,125.73 35.025,122.845 R88.1@34.925,122.845
A2: HG6.1 R101.1 | length 106.4
  Top Layer w1: v2(57.72,55.02) 57.991,55.02 59.245,56.274 69.716,56.274 70.97,55.02 103.449,55.02 103.949,55.52 v2(104.22,55.52) ; v2@107.988,58.788 108.217,58.788 108.411,58.982 108.411,59.211 109.72,60.52 HG6.1@109.72,64.52
  Bottom Layer w0.5: v1(25.4,104.14) 28.575,107.315 31.115,107.315 33.02,109.22 R101.1@33.02,110.835
  Bottom Layer w1: v1(25.4,55.88) 25.452,55.828 25.452,54.606 27.537,52.52 55.134,52.52 57.634,55.02 v2(57.72,55.02) ; v2(104.22,55.52) 107.029,58.329 108.029,58.329 v2(108.22,58.52)
A2_B: DD8.4 R96.1 | length 5.4
  Bottom Layer w1: DD8.4@25.4,127 25.459,126.941 25.459,125.861 R96.1@28.425,122.895
A3: HG5.1 R108.1 | length 81.6
  Top Layer w1: v1(22.86,55.88) 22.912,55.828 22.912,55.328 25.22,53.02 50.22,53.02 54.728,57.528 67.957,57.528 69.449,59.02 v2(69.72,59.02)
  Bottom Layer w0.5: v1(22.86,104.14) 26.67,107.95 R108.1@26.67,110.835
  Bottom Layer w1: v2(69.72,59.02) 71.22,60.52 72.606,61.906 79.834,61.906 81.22,60.52 85.72,60.52 86.626,61.426 86.626,64.086 HG5.1@87.2,64.66
A3_B: DD8.7 R104.1 | length 13.1
  Top Layer w1: v1(22.86,124.46) 30.48,124.46 DD8.7@33.02,127
  Bottom Layer w1: R104.1@22.225,122.845 22.325,122.845 22.375,122.895 22.375,122.995 22.86,123.48 v1(22.86,124.46)
A4: HG2.1 R97.1 | length 52.8
  Top Layer w1: v1(20.32,55.88) 21.96,57.52 31.72,57.52 34.22,55.02 44.22,55.02 47.47,58.27 50.224,58.27 50.783,58.829 51.529,58.829 v2(51.72,59.02) ; HG2.1@47.68,64.5 47.965,64.215 53.029,64.215 v2(53.22,64.024)
  Bottom Layer w0.5: v1(20.32,104.14) R97.1@20.32,110.835
  Bottom Layer w1: v2(51.72,59.02) 51.72,59.52 53.22,61.02 v2(53.22,64.024)
A4_B: DD8.10 R92.1 | length 26.9
  Top Layer w1: v1(15.24,124.46) v1(15.24,129.54)
  Bottom Layer w1: v1(15.24,124.46) 15.725,123.975 15.725,122.895 15.775,122.845 R92.1@15.875,122.845 ; v1(15.24,129.54) 16.51,130.81 29.21,130.81 DD8.10@33.02,134.62
A5: HG1.1 R105.1 | length 22
  Top Layer w1: v1(17.78,55.88) 20.92,59.02 24.199,59.02 24.699,59.52 v2(24.97,59.52)
  Bottom Layer w0.5: R105.1@13.97,110.835 13.97,107.95 v1(17.78,104.14)
  Bottom Layer w1: v2@25.22,59.52 HG1.1@25.22,64.52
A5_B: DD8.1 R100.1 | length 11.3
  Bottom Layer w1: R100.1@9.525,122.845 9.525,125.095 11.43,127 DD8.1@17.78,127
Base_1: R2.1 R8.2 VT1.3 | length 13.8
  Bottom Layer w1: R8.2@45.72,15.24 VT1.3@45.72,5.08 R2.1@48.26,7.62
Base_2: R11.1 R18.2 VT5.3 | length 13.8
  Bottom Layer w1: R11.1@68.58,5.08 VT5.3@66.04,7.62 R18.2@76.2,7.62
Base_3: R23.1 R30.2 VT9.3 | length 13.8
  Bottom Layer w1: R23.1@91.44,5.08 VT9.3@88.9,7.62 R30.2@99.06,7.62
BIT0: DD7.3 DD9.3 | length 117
  Top Layer w1: DD9.3@55.88,124.46 55.88,120.601 56.466,120.015 78.105,120.015 81.915,116.205 101.6,116.205 103.505,114.3 111.76,114.3 114.3,111.76 140.921,111.76 143.461,109.22 146.685,109.22 148.59,111.125 148.59,120.65 DD7.3@144.78,124.46
BIT1: DD7.6 DD11.3 | length 73.3
  Top Layer w1: DD11.3@78.74,124.46 78.74,121.92 80.645,120.015 100.33,120.015 104.14,116.205 112.395,116.205 114.935,113.665 138.298,113.665 141.473,116.84 DD7.6@144.78,116.84
BIT2: DD7.7 DD12.3 | length 51.4
  Top Layer w1: DD12.3@101.6,124.46 101.6,121.92 103.505,120.015 111.125,120.015 114.935,116.205 136.525,116.205 139.581,119.261 v1(139.7,119.261)
  Bottom Layer w1: v1(139.7,119.261) 139.76,119.261 144.721,114.3 DD7.7@144.78,114.3
BIT3: DD7.4 DD13.3 | length 21.4
  Bottom Layer w1: DD13.3@124.46,124.46 126.365,122.555 144.003,122.555 144.638,121.92 DD7.4@144.78,121.92
Clock_hor: DD4.1 VT14.1 VT15.1 | length 17.8
  Bottom Layer w1: VT15.1@109.22,10.16 VT14.1@109.22,15.24 DD4.1@109.22,27.94
Clock_min: DD2.1 VT7.1 VT8.1 | length 17.8
  Top Layer w1: v1(86.36,20.955) v1(86.36,24.249)
  Bottom Layer w1: VT8.1@86.36,10.16 VT7.1@86.36,15.24 v1(86.36,20.955) ; v1(86.36,24.249) DD2.1@86.36,27.94
Clock_sec: DD1.1 VT3.1 VT4.1 | length 7.6
  Bottom Layer w1: VT3.1@38.1,25.4 VT4.1@43.18,25.4 DD1.1@43.18,27.94
GATE: DD14.9 R118.1 | length 97.3
  Top Layer w1: v1(22.86,101.6) 26.035,98.425 98.425,98.425 101.6,101.6 101.6,106.094 101.014,106.68 99.06,106.68 96.52,109.22 DD14.9@96.52,111.76
  Bottom Layer w1: R118.1@20.32,5.08 v1(22.86,5.08)
GND: C1.2 C2.2 C3.1 C5.2 C6.2 C15.2 C16.1 C17.2 C18.1 C19.2 DA1.1 DD1.8 DD2.8 DD3.6 DD3.7 DD4.8 DD5.7 DD6.7 DD7.12 DD8.8 DD9.2 DD9.4 DD9.6 DD9.7 DD9.8 DD10.8 DD10.9 DD10.10 DD10.15 DD11.2 DD11.4 DD11.6 DD11.7 DD11.8 DD12.2 DD12.4 DD12.5 DD12.6 DD12.7 DD12.8 DD13.2 DD13.4 DD13.5 DD13.6 DD13.7 DD13.8 DD14.7 HG4.2 R3.1 R9.1 R10.1 R12.1 R16.1 R17.1 R19.1 R24.1 R25.1 R26.1 R36.1 R37.1 R38.1 R39.1 R44.1 R45.1 R46.1 R47.1 R52.1 R53.1 R54.1 R55.1 R60.1 R61.1 R62.1 R63.1 R68.1 R69.1 R70.1 R71.1 R75.1 R76.1 R77.1 R84.1 R85.1 R86.1 R89.1 R110.1 R112.1 VT1.1 VT5.1 VT9.1 VT39.1 VT44.1 VT46.1 VT48.1 VT50.1 VT52.1 VT56.3 | length 1001.5
  Top Layer w0.5: R75.1@52.995,121.92 53.168,122.093 53.168,124.288 DD9.2@53.34,124.46 ; R60.1@53.34,136.18 R52.1@55.88,136.18 R44.1@58.42,136.18 R68.1@60.96,136.18 ; DD9.4@58.42,124.46 58.42,124.183 58.765,123.838 R84.1@58.765,121.92 ; R76.1@75.855,121.92 75.855,123.838 76.2,124.183 DD11.2@76.2,124.46 ; R61.1@76.2,136.18 R53.1@78.74,136.18 R45.1@81.28,136.18 R69.1@83.82,136.18 ; DD11.4@81.28,124.46 81.453,124.287 81.453,122.092 R85.1@81.625,121.92 ; R77.1@98.715,121.92 98.715,123.838 99.06,124.183 DD12.2@99.06,124.46 ; R62.1@99.06,136.18 R54.1@101.6,136.18 R46.1@104.14,136.18 R70.1@106.68,136.18 ; R63.1@121.92,136.18 R55.1@124.46,136.18 R47.1@127,136.18 R71.1@129.54,136.18
  Top Layer w1: v1(10.16,12.7) v1(15.24,12.7) ; C3.1@10.16,40.64 C2.2@17.78,40.64 ; VT50.1@11.43,109.22 VT46.1@17.78,109.22 VT52.1@24.13,109.22 VT48.1@30.48,109.22 VT44.1@36.83,109.22 VT39.1@43.18,109.22 50.11,109.22 52.995,112.105 ; 12.7,45.72 27.94,45.72 DD3.7@30.48,43.18 ; v1(27.94,10.16) 31.75,13.97 34.29,13.97 ; R89.1@27.94,139.7 38.1,139.7 43.18,134.62 ; DD8.8@35.56,127 40.64,127 43.18,129.54 ; 36.83,31.75 57.15,31.75 DD1.8@60.96,27.94 ; v1(38.1,10.16) 34.29,13.97 ; v1(50.8,40.64) 48.26,43.18 40.64,43.18 R10.1@38.1,40.64 38.1,33.512 34.29,29.702 34.29,13.97 ; R75.1@52.995,121.92 52.995,118.11 ; DD9.2@53.34,124.46 50.8,127 45.72,127 43.18,129.54 ; R60.1@53.34,136.18 44.74,136.18 43.18,134.62 ; v1(55.88,69.85) 55.88,71.12 56.201,71.441 v1(56.201,75.886) ; DD10.8@55.88,109.22 52.995,112.105 ; v1(55.88,118.11) 52.995,118.11 ; R24.1@60.96,22.86 60.96,17.78 VT5.1@66.04,12.7 ; R68.1@60.96,136.18 64.48,136.18 v1(66.04,134.62) ; R36.1@63.5,40.64 63.5,40.498 64.135,39.863 64.135,32.385 66.04,30.48 78.74,30.48 ; DD9.6@63.5,124.46 DD9.7@66.04,124.46 DD9.8@68.58,124.46 ; v1(68.58,137.16) 68.653,137.16 69.633,136.18 R61.1@76.2,136.18 ; DD10.15@71.12,101.6 73.025,99.695 81.915,99.695 83.185,100.965 ; DD11.2@76.2,124.46 78.105,126.365 84.455,126.365 DD11.6@86.36,124.46 DD11.7@88.9,124.46 DD11.8@91.44,124.46 93.345,126.365 100.965,126.365 ; R25.1@81.28,22.86 DD5.7@81.28,27.94 78.74,30.48 ; R16.1@81.28,40.64 81.28,38.1 82.796,36.584 82.796,34.536 78.74,30.48 ; v1(81.915,106.045) 80.645,104.775 80.645,103.505 83.185,100.965 ; R37.1@83.82,43.18 86.36,43.18 87.376,44.196 v1(90.989,44.196) ; R69.1@83.82,136.18 87.34,136.18 v1(88.9,134.62) ; VT9.1@88.9,12.7 92.075,9.525 94.615,9.525 99.06,5.08 102.87,5.08 105.41,2.54 123.19,2.54 ; v1(91.44,137.16) 91.513,137.16 92.493,136.18 R62.1@99.06,136.18 ; DD14.7@99.06,104.14 98.96,104.04 98.96,102.135 97.79,100.965 83.185,100.965 ; DD12.2@99.06,124.46 100.965,126.365 ; v1(104.14,104.14) 106.68,101.6 R112.1@139.7,101.6 141.605,99.695 146.05,99.695 ; R70.1@106.68,136.18 110.2,136.18 v1(111.76,134.62) ; DD12.8@114.3,124.46 DD12.7@111.76,124.46 DD12.6@109.22,124.46 DD12.5@106.68,124.46 DD12.4@104.14,124.46 102.235,126.365 100.965,126.365 ; v1(114.3,137.16) 114.373,137.16 115.353,136.18 R63.1@121.92,136.18 ; v4(120.65,15.24) 123.19,12.7 123.19,2.54 ; DD13.2@121.92,124.46 122.062,124.46 123.578,122.944 125.342,122.944 126.858,124.46 DD13.4@127,124.46 DD13.5@129.54,124.46 DD13.6@132.08,124.46 DD13.7@134.62,124.46 DD13.8@137.16,124.46 139.7,127 139.7,134.62 142.24,137.16 145.415,137.16 150.495,132.08 150.495,117.475 ; R26.1@129.54,22.86 129.54,20.32 134.62,15.24 137.16,15.24 147.32,25.4 DD6.7@147.32,27.94 149.86,30.48 149.86,38.1 ; R39.1@129.54,43.038 R39.1@129.54,43.18 ; C6.2@134.62,5.08 132.08,2.54 123.19,2.54 ; R38.1@137.16,43.18 139.7,45.72 142.24,45.72 149.86,38.1 ; C1.2@147.32,12.7 147.32,15.24 154.94,22.86 154.94,33.02 149.86,38.1 ; v1(149.86,99.06) 149.225,99.695 146.05,99.695 ; DD7.12@152.4,119.38 150.495,117.475 ; 43.18,129.54 43.18,134.62 ; 52.995,112.105 52.995,118.11 ; 146.05,99.695 150.495,104.14 150.495,117.475
  Bottom Layer w0.5: DD14.7@99.06,104.14 99.06,104.417 98.715,104.762 C15.2@98.715,106.68 98.715,106.88 98.965,107.13 99.165,107.13 99.985,107.95 C17.2@99.985,109.22 ; DD12.8@114.3,124.318 115.23,123.388 115.23,121.97 R86.1@115.28,121.92
  Bottom Layer w1: VT56.3@10.16,10.16 v1(10.16,12.7) ; v1(15.24,12.7) 17.78,10.16 22.86,10.16 ; C19.2@25.4,16.51 25.4,12.7 22.86,10.16 ; v1(27.94,10.16) 22.86,10.16 ; DD3.7@30.48,43.18 DD3.6@30.48,40.64 R3.1@33.02,40.64 R10.1@38.1,40.64 ; v1(38.1,10.16) 38.1,7.62 VT1.1@40.64,5.08 ; v1(50.8,40.64) R36.1@63.5,40.64 ; DD9.2@53.34,124.46 55.245,126.365 60.325,126.365 ; DD10.9@55.88,101.6 DD10.10@58.42,101.6 60.96,104.14 ; v1(56.201,75.886) 61.426,81.111 63.331,81.111 HG4.2@63.5,81.28 ; R110.1@56.225,111.76 56.175,111.71 56.175,109.657 55.88,109.362 DD10.8@55.88,109.22 55.88,106.68 58.42,104.14 60.96,104.14 ; DD9.4@58.42,124.46 60.325,126.365 ; R24.1@60.96,22.86 R9.1@60.96,25.4 DD1.8@60.96,27.94 ; DD9.6@63.5,124.46 61.595,126.365 60.325,126.365 ; v1(66.04,134.62) v1(68.58,137.16) ; DD10.15@71.12,101.6 68.58,104.14 60.96,104.14 ; R16.1@81.28,40.64 R37.1@83.82,43.18 ; v1(81.915,106.045) 81.915,103.901 83.581,102.235 C16.1@86.705,102.235 ; v1(88.9,134.62) v1(91.44,137.16) ; v1(90.989,44.196) 105.664,44.196 106.68,43.18 ; DD14.7@99.06,104.14 v1(104.14,104.14) ; R12.1@104.14,25.4 DD2.8@104.14,27.94 104.14,33.02 106.266,35.146 106.266,35.974 104.14,38.1 R19.1@104.14,40.64 106.68,43.18 ; v1(111.76,134.62) v1(114.3,137.16) ; DD12.8@114.3,124.318 DD12.8@114.3,124.46 ; DD4.8@127,27.94 R17.1@127,25.4 R26.1@129.54,22.86 ; R39.1@129.54,43.18 106.68,43.18 ; C6.2@134.62,5.08 C5.2@139.7,5.08 143.58,5.08 143.82,5.32 DA1.1@144.395,5.32 146.734,5.32 ; DD6.7@147.32,27.94 C1.2@147.32,12.7 147.32,5.906 146.734,5.32 ; v1(149.86,2.54) 149.514,2.54 146.734,5.32
H1_Q1: DD4.3 VT36.2 | length 72.4
  Top Layer w1: v1(6.985,151.13) 10.16,147.955 64.135,147.955 v1(71.12,154.94)
  Bottom Layer w0.5: VT36.2@49.85,119.5 49.85,118.425 v1(50.165,118.11)
  Bottom Layer w1: v1(114.3,25.4) DD4.3@114.3,27.94
H1_Q2: DD4.4 DD6.1 VT37.2 | length 73.7
  Top Layer w1: v1(29.845,151.13) 31.369,149.606 61.976,149.606 69.85,157.48 72.39,157.48 73.608,156.262 73.608,154.992 v1(73.66,154.94)
  Bottom Layer w0.5: VT37.2@72.71,119.5 72.71,118.425 v1(73.025,118.11)
  Bottom Layer w1: v1(116.84,25.4) DD4.4@116.84,27.94 116.84,29.845 118.11,31.115 130.81,31.115 132.08,29.845 DD6.1@132.08,27.94
H1_Q3: DD4.5 DD6.13 VT38.2 | length 84
  Top Layer w1: DD4.5@119.38,27.94 119.38,22.86 121.92,20.32 127,20.32 133.985,13.335 v1(136.525,13.335) ; DD6.13@134.52,35.66 DD6.13@134.62,35.56 134.62,31.75 133.35,30.48 131.445,30.48 130.564,29.599 130.564,26.916 132.715,24.765 135.255,24.765 v1(139.065,20.955)
  Bottom Layer w0.5: VT38.2@95.57,119.5 95.57,118.425 v1(95.885,118.11)
  Bottom Layer w1: v1(52.705,151.13) 72.39,151.13 v1(76.2,154.94) ; v1(136.525,13.335) 139.065,15.875 v1(139.065,20.955)
  other v1: 119.38,25.4
H1_Q4: DD4.6 DD6.2 | length 26.6
  Bottom Layer w1: v1(75.565,151.13) 78.688,154.253 78.688,154.888 v1(78.74,154.94) ; v1(121.92,25.4) DD4.6@121.92,27.94 121.92,29.259 122.506,29.845 128.954,29.845 129.54,29.259 129.54,26.621 130.126,26.035 134.034,26.035 134.62,26.621 DD6.2@134.62,27.94
H10_Q1: DD4.11 DD6.8 VT40.2 | length 114.1
  Top Layer w1: v1(17.145,151.13) 23.622,157.607 23.622,168.91 28.067,173.355 76.2,173.355 77.724,171.831 77.724,170.434 78.688,169.47 78.688,167.692 v1(78.74,167.64)
  Bottom Layer w0.5: VT40.2@60.01,119.5 60.01,118.425 v1(60.325,118.11)
  Bottom Layer w1: v1(121.92,38.1) DD4.11@121.92,35.56 122.02,35.46 122.02,34.241 122.606,33.655 146.685,33.655 147.22,34.19 147.22,35.46 DD6.8@147.32,35.56
H10_Q2: DD4.12 DD6.9 VT41.2 | length 89
  Top Layer w1: v1(40.005,151.13) 41.91,153.035 61.595,153.035 v1(76.2,167.64)
  Bottom Layer w0.5: VT41.2@82.87,119.5 82.87,118.425 v1(83.185,118.11)
  Bottom Layer w1: v1(76.2,167.64) v1@76.252,167.588 ; v1(119.38,38.1) DD4.12@119.38,35.56 119.38,33.655 120.65,32.385 147.955,32.385 149.225,33.655 149.225,36.195 147.955,37.465 145.415,37.465 144.78,36.83 DD6.9@144.78,35.56
H10_Q3: DD4.13 VT42.2 | length 1.5
  Bottom Layer w0.5: VT42.2@118.43,119.5 118.43,118.425 v1(118.745,118.11)
H10_Q4: DD4.14
Hz_1: DD3.5 VT2.3 VT4.3 VT6.3 VT13.3 | length 196.5
  Top Layer w1: VT13.3@96.52,15.24 96.52,17.733 98.472,19.685 102.87,19.685 104.775,17.78 109.855,17.78 v1(111.125,16.51)
  Bottom Layer w1: DD3.5@30.48,38.1 33.02,38.1 35.56,35.56 35.56,10.16 ; VT2.3@38.1,12.7 35.56,10.16 ; VT4.3@43.18,20.32 48.26,20.32 53.34,15.24 53.34,5.08 50.8,2.54 ; VT6.3@73.66,15.24 66.04,15.24 63.5,12.7 63.5,5.08 60.96,2.54 ; v1(111.125,16.51) 111.125,16.437 111.76,15.802 111.76,7.62 109.22,5.08 99.822,5.08 97.163,2.421 61.079,2.421 60.96,2.54 ; 35.56,10.16 35.56,5.08 38.1,2.54 50.8,2.54 ; 50.8,2.54 60.96,2.54
K0: DD7.16 HG1.2 HG2.2 HG5.2 HG6.2 HG7.2 HG8.2 | length 232.7
  Top Layer w1: HG6.2@111.72,68.52 114.22,66.02 114.22,61.02 113.22,60.02 v2(113.22,58.52) ; v2(119.72,55.52) 131.72,55.52 ; HG7.2@132.2,70.62 132.3,70.52 133.634,70.52 134.22,69.934 134.22,58.02 131.72,55.52 ; HG8.2@144.9,70.62 148.12,70.62 ; v1(154.94,81.28) 153.22,79.56 153.22,76.52 151.72,75.02 151.72,73.52 148.82,70.62 148.12,70.62 ; 131.72,55.52 136.22,55.52 137.72,54.02 153.72,54.02 154.72,55.02 154.72,59.02 151.22,62.52 151.22,67.52 148.12,70.62
  Bottom Layer w1: HG1.2@27.22,68.52 HG1.2@27.642,68.098 ; HG1.2@28.22,68.52 28.47,68.27 28.47,64.77 31.72,61.52 40.22,61.52 41.22,60.52 48.72,60.52 51.22,63.02 51.22,66.414 ; HG2.2@49.68,68.5 49.68,67.954 51.22,66.414 ; HG5.2@89.2,68.66 91.22,66.64 91.22,62.52 89.22,60.52 ; v2@119.917,55.323 116.72,58.52 v2(113.22,58.52) 112.949,58.52 106.449,52.02 97.72,52.02 89.22,60.52 ; DD7.16@152.4,129.54 v1(154.94,129.54) ; 51.22,66.414 53.31,66.414 56.775,62.95 56.775,62.485 60.239,59.02 66.72,59.02 68.72,57.02 70.72,57.02 74.22,60.52 78.72,60.52 80.72,58.52 87.22,58.52 89.22,60.52
K1: DD7.15 HG1.11 HG2.11 HG5.11 HG6.11 HG7.3 HG8.3 | length 237.7
  Top Layer w1: HG1.11@16.22,64.52 16.445,64.295 16.445,61.795 17.72,60.52 22.22,60.52 23.22,61.52 26.22,61.52 27.72,60.02 29.72,60.02 ; v2(32.72,64.02) 32.72,63.02 29.72,60.02 ; v2(94.72,62.52) 95.22,62.52 97.22,64.52 HG6.11@100.72,64.52 ; v2@96.949,58.52 96.758,58.711 96.005,58.711 95.947,58.77 80.556,58.77 79.97,59.356 79.97,59.434 79.384,60.02 71.22,60.02 70.411,60.829 68.411,60.829 v2(68.22,61.02) 66.22,59.02 54.72,59.02 52.966,60.774 50.247,60.774 49.243,59.77 46.474,59.77 45.724,59.02 39.72,59.02 38.72,60.02 29.72,60.02 ; v2(97.22,58.52) 97.491,58.52 98.991,60.02 102.22,60.02 107.22,55.02 114.22,55.02 125.72,66.52 125.72,74.749 126.251,75.28 126.251,85.735 v2(126.282,85.766) ; HG8.3@144.9,73.16 144.9,73.302 142.22,75.982 142.22,77.52 146.765,82.065 v1(149.577,82.065)
  Bottom Layer w1: v2(32.72,64.02) 33.2,64.5 HG2.11@38.68,64.5 ; v2(68.22,61.02) 71.86,64.66 HG5.11@78.2,64.66 ; v2(94.72,62.52) 97.22,60.02 v2(97.22,58.52) ; v2(126.22,75.52) 131.22,75.52 132.22,74.52 132.22,73.18 HG7.3@132.2,73.16 ; v2(126.282,85.766) 126.473,85.957 127.18,85.957 127.243,86.02 137.22,86.02 141.72,81.52 141.72,76.34 HG8.3@144.9,73.16 ; v1(149.577,82.065) 151.615,82.065 v1(154.94,78.74) ; DD7.15@152.4,127 v1(154.94,127)
K2: DD7.8 HG1.10 HG2.10 HG5.10 HG6.10 HG7.4 HG8.4 | length 318.4
  Top Layer w1: v2(28.22,62.02) 31.23,65.03 v2(31.23,68.51) ; v2(55.72,60.774) 55.843,60.897 60.597,60.897 v2(60.72,61.02) ; v2(89.72,57.016) v2(95.22,57.016) ; v2(94.72,65.02) 94.738,65.038 94.738,66.538 96.22,68.02 98.22,68.02 HG6.10@98.72,68.52 ; v2@125.72,62.02 125.244,62.02 121.726,58.502 120.202,58.502 117.134,55.434 117.134,54.606 118.22,53.52 120.72,53.52 121.22,54.02 126.72,54.02 128.22,52.52 154.22,52.52 156.22,54.52 156.22,60.02 154.94,61.3 v1(154.94,63.5) ; HG7.4@129.66,73.16 129.69,73.19 129.69,78.99 v1(129.72,79.02) ; v1(132.72,79.02) 138.58,73.16 HG8.4@142.36,73.16
  Bottom Layer w1: HG1.10@14.22,68.52 14.22,67.954 12.7,66.434 12.7,62.54 15.97,59.27 21.97,59.27 23.72,57.52 27.22,57.52 29.97,60.27 ; v2(28.22,62.02) 29.97,60.27 ; v2(31.23,68.51) 36.67,68.51 HG2.10@36.68,68.5 ; v2(55.72,60.774) 55.72,60.52 53.72,58.52 ; v2(60.72,61.02) 60.72,67.02 62.22,68.52 76.06,68.52 HG5.10@76.2,68.66 ; v2@89.72,57.52 v2(89.72,57.016) 87.724,55.02 68.22,55.02 65.72,57.52 59.474,57.52 58.474,58.52 53.72,58.52 ; v2(94.72,65.02) 92.72,63.02 92.72,59.52 95.22,57.02 v2(95.22,57.016) 98.47,53.766 105.966,53.766 112.72,60.52 119.72,60.52 v2(121.732,58.508) ; v2(126.22,62.02) 116.22,72.02 116.22,74.52 117.22,75.52 123.22,75.52 125.72,73.02 127.378,73.02 127.418,73.06 129.56,73.06 HG7.4@129.66,73.16 ; v1(129.72,79.02) v1(132.72,79.02) ; DD7.8@144.78,111.76 147.32,109.22 152.4,109.22 v1(154.94,111.76) ; 29.97,60.27 30.22,60.02 39.22,60.02 42.22,57.02 52.22,57.02 53.72,58.52